# EAGLE board thermostat (EAGLE 5.11)
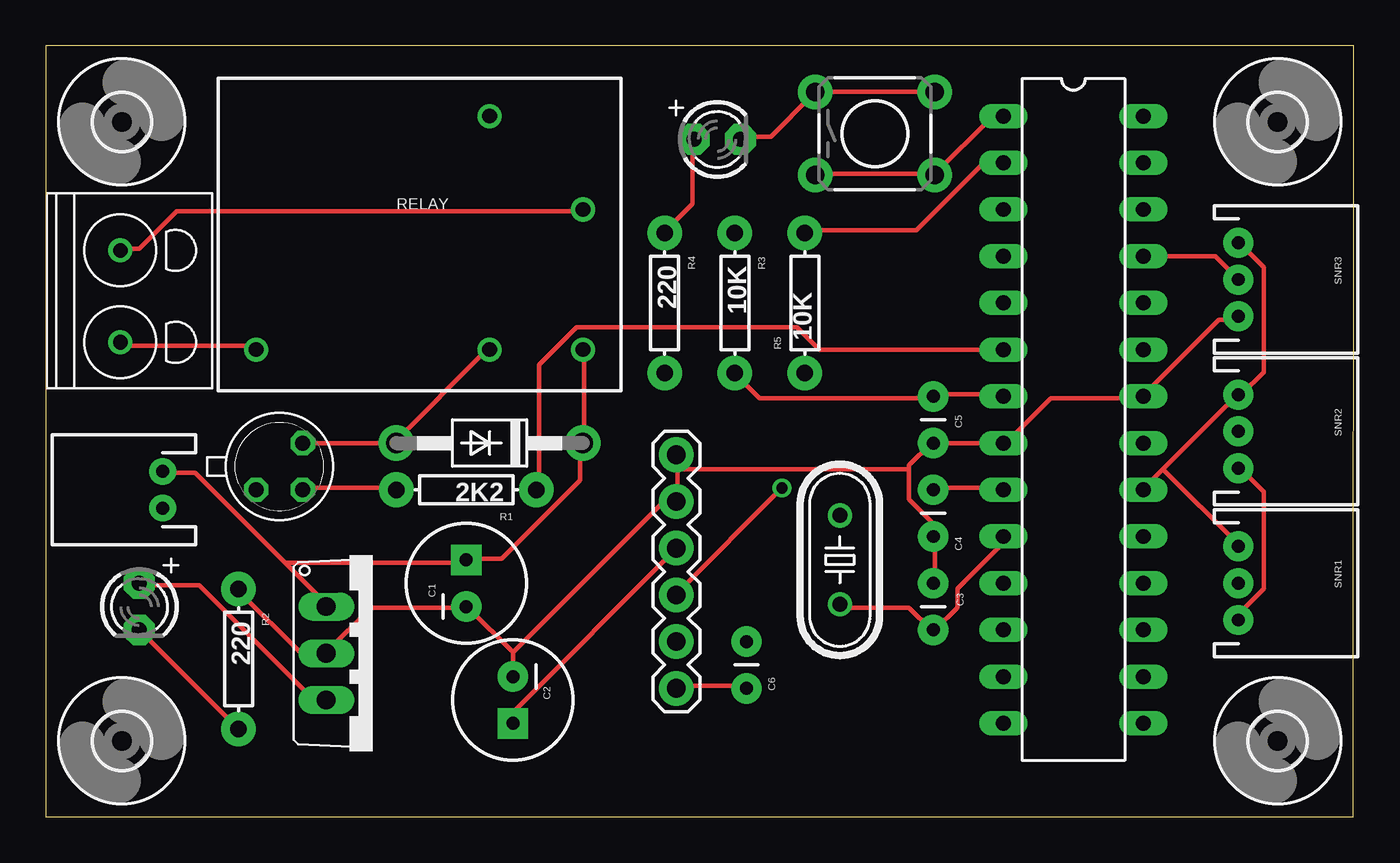
[diagram p0: board, top side]
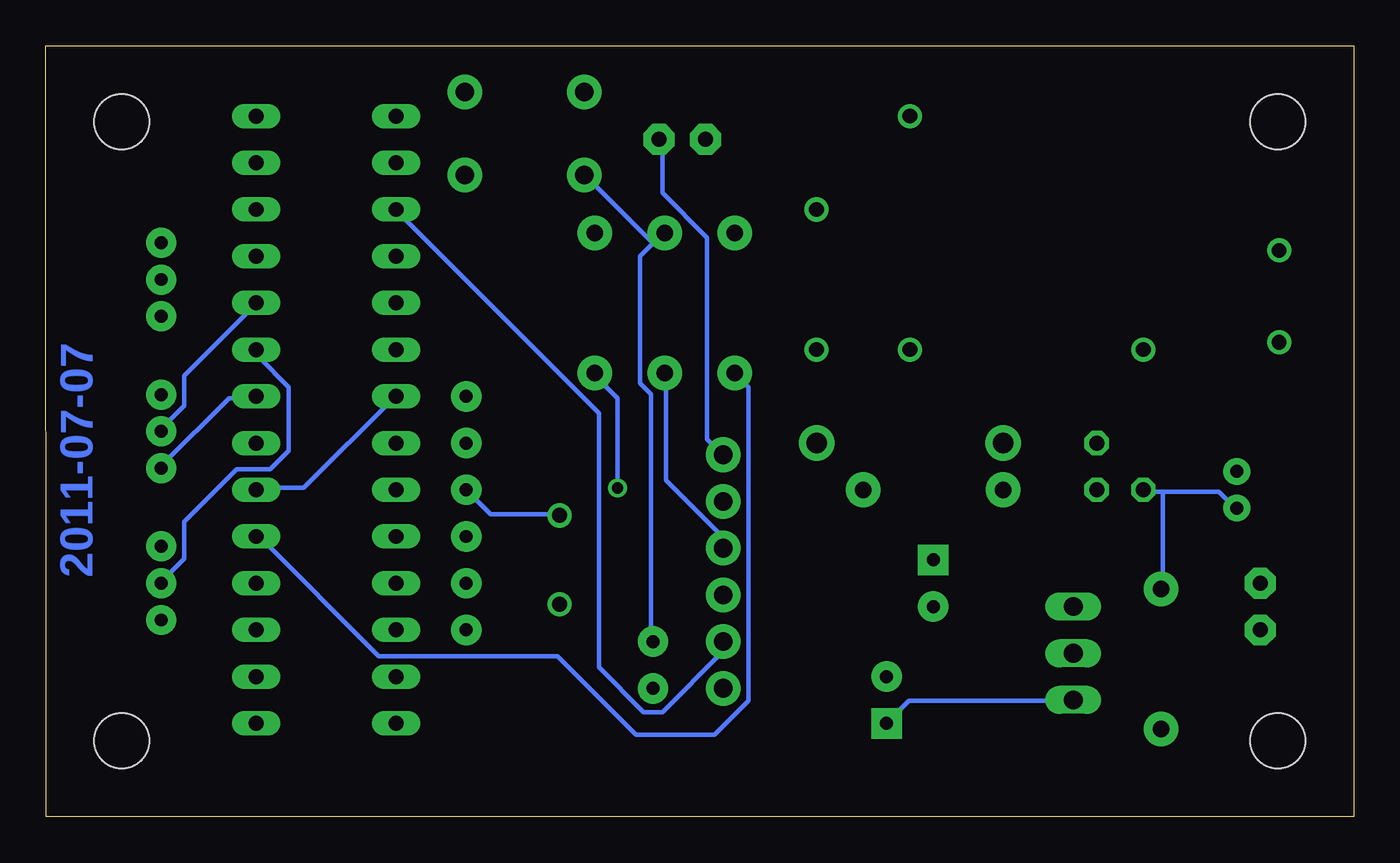
[diagram p1: board, bottom side, seen from below]

Size 71.12 x 41.91 mm. Coordinates in mm from the lower left corner, seen from the top.
Outline: 0,0 71.11,0 71.12,41.91 0,41.91 0,0
Copper layers (1*16): Top 0.035mm / dielectric 1.5mm / Bottom 0.035mm
Design rules "default": minimum track width 10mil, minimum drill 24mil, track to track 8mil, track to pad 8mil, pad to pad 8mil, via to via 8mil, smd to smd 8mil, copper to edge 40mil, drill to drill 8mil, minimum pad ring 10mil, minimum via ring 8mil, stop-mask expansion 4mil, vias tented up to drill 0mil, thermal gap 10mil
Net classes: 0 default: width 0.254 mm, clearance 0.254 mm; 2 gnd: width 0.305 mm, drill 0.559 mm, clearance 0.254 mm; 3 usbvcc: width 0.508 mm, drill 0.61 mm, clearance 0.254 mm; 4 aref: width 0.406 mm, drill 0.61 mm, clearance 0.254 mm

## Footprints (pad centres in the part's own frame; a part is rotated, then mirrored left to right if it is on the bottom)
CPOL-RADIAL-100UF-25V = drill 0.7 pad 1.651 square: 1 1.27,0 | drill 0.7 pad 1.651 round: 2 -1.27,0
CAP-PTH-SMALL = drill 0.7 pad 1.651 round: 1 0,0; 2 2.54,0
JST-2-PTH = drill 0.7 pad 1.448 round: 1 -1,0; 2 1,0
DO41-10 = drill 1.118 pad 1.93 round: A 5.08,0; C -5.08,0
TO220V = drill 1.016 long: 1 -2.54,-2.54; 2 0,-2.54; 3 2.54,-2.54
1X06 = drill 1.016 pad 1.88 round: 1 0,0; 2 2.54,0; 3 5.08,0; 4 7.62,0; 5 10.16,0; 6 12.7,0
LED3MM = drill 0.813 pad 1.676 octagon: A -1.27,0; K 1.27,0
TA5.0X2 = drill 0.8 round: P$1 0,0; P$2 0,-5
HC49/S = drill 0.813 round: 1 -2.413,0; 2 2.413,0
AXIAL-0.3 = drill 0.9 pad 1.88 round: P$1 -3.81,0; P$2 3.81,0
OUDH-SS-112D = drill 0.8 round: COIL1 8.89,-6.35; COIL2 3.81,-6.35; MAIN -8.89,-6.35; NC 3.81,6.35; NO 8.89,1.27
TACTILE-PTH = drill 1.016 pad 1.88 round: 1 -3.251,2.261; 2 3.251,2.261; 3 -3.251,-2.261; 4 3.251,-2.261
JST-3-PTH = drill 0.7 pad 1.626 round: 1 -2,-5; 2 0,-5; 3 2,-5
TO18 = drill 0.813 octagon: 1 -1.27,-1.27; 2 1.27,-1.27; 3 1.27,1.27
MOUNTINGHOLE_3.0 = hole 3: 0,0
DIL28-3 = drill 0.813 long: 1 -16.51,-3.81; 2 -13.97,-3.81; 3 -11.43,-3.81; 4 -8.89,-3.81; 5 -6.35,-3.81; 6 -3.81,-3.81; 7 -1.27,-3.81; 8 1.27,-3.81; 9 3.81,-3.81; 10 6.35,-3.81; 11 8.89,-3.81; 12 11.43,-3.81; 13 13.97,-3.81; 14 16.51,-3.81; 15 16.51,3.81; 16 13.97,3.81; 17 11.43,3.81; 18 8.89,3.81; 19 6.35,3.81; 20 3.81,3.81; 21 1.27,3.81; 22 -1.27,3.81; 23 -3.81,3.81; 24 -6.35,3.81; 25 -8.89,3.81; 26 -11.43,3.81; 27 -13.97,3.81; 28 -16.51,3.81

## Placement (x,y rotation side)
C1  100uF/25V  [CPOL-RADIAL-100UF-25V]  22.86,12.7 90 top
C2  10uF/10V  [CPOL-RADIAL-100UF-25V]  25.4,6.35 270 top
C3  22pF  [CAP-PTH-SMALL]  48.26,12.7 270 top
C4  22pF  [CAP-PTH-SMALL]  48.26,15.24 90 top
C5  0.1uF  [CAP-PTH-SMALL]  48.26,20.32 90 top
C6  0.1uF  [CAP-PTH-SMALL]  38.1,6.99 90 top
CN1  POWER  [JST-2-PTH]  6.35,17.78 90 top
D1  1N4004  [DO41-10]  24.13,20.32 180 top
IC1  7805TV  [TO220V]  17.78,8.89 270 top
JP1  XBee/Program  [1X06]  34.29,6.99 90 top
LED1  POWER  [LED3MM]  5.08,11.43 270 top
LED2  STATUS  [LED3MM]  36.51,36.83 0 top
LOAD  TA5.0X2  [TA5.0X2]  4.05,30.8 0 top
Q1  16MHz  [HC49/S]  43.18,13.97 270 top
R1  2K2  [AXIAL-0.3]  22.86,17.78 180 top
R2  220  [AXIAL-0.3]  10.48,8.57 270 top
R3  10K  [AXIAL-0.3]  37.47,27.94 270 top
R4  220  [AXIAL-0.3]  33.66,27.94 270 top
R5  10K  [AXIAL-0.3]  41.27,27.94 90 top
RELAY  OUDH-SS-112D  [OUDH-SS-112D]  20.32,31.75 0 top
S1  [TACTILE-PTH]  45.09,37.15 0 top
SNR1  SENSOR 1  [JST-3-PTH]  69.85,12.7 270 top
SNR2  SENSOR 2  [JST-3-PTH]  69.85,20.95 270 top
SNR3  SENSOR 3  [JST-3-PTH]  69.85,29.21 270 top
T1  2N2222  [TO18]  12.7,19.05 0 top
U$1  [MOUNTINGHOLE_3.0]  4.13,37.78 0 top
U$2  [MOUNTINGHOLE_3.0]  66.99,37.78 0 top
U$3  [MOUNTINGHOLE_3.0]  4.13,4.13 0 top
U$4  [MOUNTINGHOLE_3.0]  66.99,4.13 0 top
ZIC1  ATMEGA328  [DIL28-3]  55.88,21.59 270 top

## Library data of the parts
C1-C6 CN1 JP1 R1-R5 S1 SNR1-SNR3 = SparkFun
D1 LED1 LED2 = adafruit
IC1 = linear
LOAD RELAY = sudarkoff
Q1 = crystal; OC_FARNELL: 1667008; OC_NEWARK: unknown
T1 = transistor
U$1-U$4 = microbuilder
ZIC1 = atmel

## Nets
+5V: C2.1 C5.2 IC1.3 JP1.4 LED1.A R3.P$2 SNR1.1 SNR2.1 SNR3.1 ZIC1.7 ZIC1.20
+12V: C1.1 CN1.2 D1.C IC1.1 RELAY.COIL1
DTR: C6.1 JP1.1
GND: C1.2 C2.2 C3.1 C4.1 C5.1 CN1.1 IC1.2 JP1.5 JP1.6 LED2.K R2.P$1 S1.1 S1.2 SNR1.3 SNR2.3 SNR3.3 T1.1 ZIC1.8 ZIC1.22
N$1: D1.A RELAY.COIL2 T1.3
N$2: LOAD.P$2 RELAY.MAIN
N$3: LOAD.P$1 RELAY.NO
N$4: R1.P$2 T1.2
N$5: C3.2 Q1.2 ZIC1.10
N$6: LED1.K R2.P$2
N$7: C4.2 Q1.1 ZIC1.9
N$8: C6.2 R3.P$1 S1.3 S1.4 ZIC1.1
N$9: JP1.3 R5.P$1
N$11: R4.P$2 ZIC1.19
N$12: LED2.A R4.P$1
RELAY: R1.P$1 ZIC1.6
RX: R5.P$2 ZIC1.2
SENSOR1: SNR1.2 ZIC1.23
SENSOR2: SNR2.2 ZIC1.24
SENSOR3: SNR3.2 ZIC1.25
TX: JP1.2 ZIC1.3

## Tracks (layer width: path | path; a pad name or v marks a point on that pad's centre or on a via)
+5V
  Top 0.254: LED1.A 5.08,12.6 8.33,12.6 14.43,6.5 15.24,6.5 IC1.3 | 60.76,18.9 64.82,22.96 SNR2.1 65.02,22.96 66.24,24.18 66.24,29.87 65.02,31.09 SNR3.1 | 60.76,18.9 59.74,17.88 ZIC1.20 | 60.76,18.9 64.82,14.83 SNR1.1 | ZIC1.7 52.02,22.96 48.36,22.96 C5.2 48.16,22.76 38.81,22.76 37.59,23.98 R3.P$2 | C2.1 25.4,5.69 34.14,14.43 JP1.4
  Bottom 0.254: C2.1 24.18,6.3 15.24,6.3 IC1.3 | JP1.4 34.34,14.63 34.34,15.24 37.39,18.29 37.39,23.98 R3.P$2 | ZIC1.20 59.54,17.88 57.1,17.88 52.22,22.76 ZIC1.7
+12V
  Top 0.254: RELAY.COIL1 29.26,25.4 29.26,20.32 D1.C 29.06,20.32 29.06,18.29 24.79,14.02 22.96,14.02 C1.1 22.76,13.82 13.01,13.82 | 13.01,13.82 15.24,11.58 IC1.1 | 13.01,13.82 8.13,18.69 6.5,18.69 CN1.2
DTR
  Top 0.254: C6.1 38,7.11 34.34,7.11 JP1.1
GND
  Top 0.254: 25.4,8.94 25.4,7.72 C2.2 | 25.4,8.94 22.96,11.38 C1.2 22.76,11.38 17.68,11.38 15.24,8.94 | 15.24,8.94 13.82,8.94 10.57,12.19 R2.P$1 | 15.24,8.94 IC1.2 15.24,8.94 | SNR1.3 65.02,10.77 65.02,11.18 66.24,12.39 66.24,17.68 65.02,18.9 SNR2.3 | SNR3.3 64.82,27.03 63.8,27.03 59.74,22.96 ZIC1.22 59.54,22.76 54.66,22.76 52.22,20.32 ZIC1.8 52.02,20.32 48.36,20.32 C5.1 48.16,20.32 46.94,19.1 46.94,18.9 | LED2.K 37.8,36.98 39.42,36.98 41.66,39.22 S1.1 41.86,39.42 48.16,39.42 S1.2 | 34.34,18.9 34.34,19.51 JP1.6 34.34,18.9 | 34.34,17.88 34.34,18.9 | 34.34,17.88 34.34,17.27 JP1.5 34.34,17.88 | C3.1 48.36,12.8 48.36,15.24 C4.1 48.16,15.24 48.16,16.05 46.94,17.27 46.94,18.9 | 34.34,18.9 46.94,18.9 | 25.4,8.94 34.34,17.88
  Bottom 0.254: 10.36,17.68 7.32,17.68 6.5,16.87 CN1.1 | 10.36,17.68 11.38,17.68 T1.1 | 10.36,17.68 10.36,12.39 R2.P$1 | ZIC1.22 59.74,22.76 61.16,22.76 64.82,19.1 SNR2.3 | LED2.K 37.59,36.78 37.59,33.93 35.15,31.5 35.15,20.52 34.34,19.71 JP1.6
N$1
  Top 0.254: 18.9,20.32 23.98,25.4 RELAY.COIL2 | 18.9,20.32 D1.A 18.9,20.32 | 18.9,20.32 14.02,20.32 T1.3
N$2
  Top 0.254: LOAD.P$2 4.06,25.6 11.18,25.6 11.38,25.4 RELAY.MAIN
N$3
  Top 0.254: 7.11,32.92 29.06,32.92 RELAY.NO | 7.11,32.92 7.04,32.84 | 7.11,32.92 5.08,30.89 4.06,30.89 LOAD.P$1
N$4
  Top 0.254: T1.2 14.02,17.88 18.9,17.88 R1.P$2
N$5
  Top 0.254: Q1.2 43.28,11.38 46.94,11.38 48.16,10.16 C3.2 48.36,10.16 49.58,11.38 49.58,12.39 52.02,14.83 52.02,15.24 ZIC1.10
N$6
  Top 0.254: LED1.K 10.36,4.88 R2.P$2
N$7
  Top 0.254: ZIC1.9 52.02,17.88 48.36,17.88 C4.2
  Bottom 0.254: Q1.1 43.28,16.46 46.94,16.46 48.16,17.68 C4.2
N$8
  Top 0.254: ZIC1.1 52.02,38 51.41,38 48.36,34.95 S1.4 48.16,34.95 41.86,34.95 S1.3
  Bottom 0.254: 38,31.29 37.59,31.7 R3.P$1 38,31.29 | 38,31.29 38.81,30.48 38.81,23.57 38.2,22.96 38.2,9.55 C6.2 | 38,31.29 38.2,31.29 41.66,34.75 S1.3
N$9  (via drill 0.61)
  Top 0.254: v40.03,17.88 34.34,12.19 JP1.3
  Bottom 0.254: v40.03,17.88 40.03,22.76 41.25,23.98 R5.P$1
N$11
  Bottom 0.254: ZIC1.19 59.54,15.24 53.03,8.74 43.28,8.74 39.01,4.47 34.75,4.47 32.92,6.3 32.92,23.37 33.53,23.98 R4.P$2
N$12
  Top 0.254: LED2.A 35.15,36.78 35.15,33.33 33.73,31.9 R4.P$1
RELAY
  Top 0.254: ZIC1.6 52.02,25.4 42.06,25.4 40.84,26.62 28.85,26.62 26.82,24.59 26.82,17.88 R1.P$1
RX
  Top 0.254: ZIC1.2 52.02,35.56 51,35.56 47.35,31.9 41.45,31.9 R5.P$2
SENSOR1
  Bottom 0.254: ZIC1.23 59.54,25.4 59.54,24.99 57.91,23.37 57.91,19.91 58.93,18.9 60.76,18.9 63.6,16.05 63.6,14.02 64.82,12.8 SNR1.2
SENSOR2
  Bottom 0.254: ZIC1.24 59.74,27.84 63.6,23.98 63.6,22.35 64.82,21.13 SNR2.2
SENSOR3
  Top 0.254: ZIC1.25 59.74,30.48 63.6,30.48 64.82,29.26 SNR3.2
TX
  Bottom 0.254: ZIC1.3 52.02,32.92 41.05,21.95 41.05,8.13 38.61,5.69 37.59,5.69 34.34,8.94 34.34,9.35 JP1.2

## Text on the board
Bottom: 2011-07-07
tValues: GND | CTS | 5V | RX | TX | DTR | XBeeThermostat 1.0 | http://g.sud.to/ha